# Altium PCB ESC_v7.PcbDoc
Units mm, origin at the board's own origin, x right, y up, seen from the top; angles counter-clockwise.
Board outline 42.8 x 30.48 mm, 2 copper layers (Top Layer, Bottom Layer); 64 components, 49 nets, 190 pads, 0 vias.
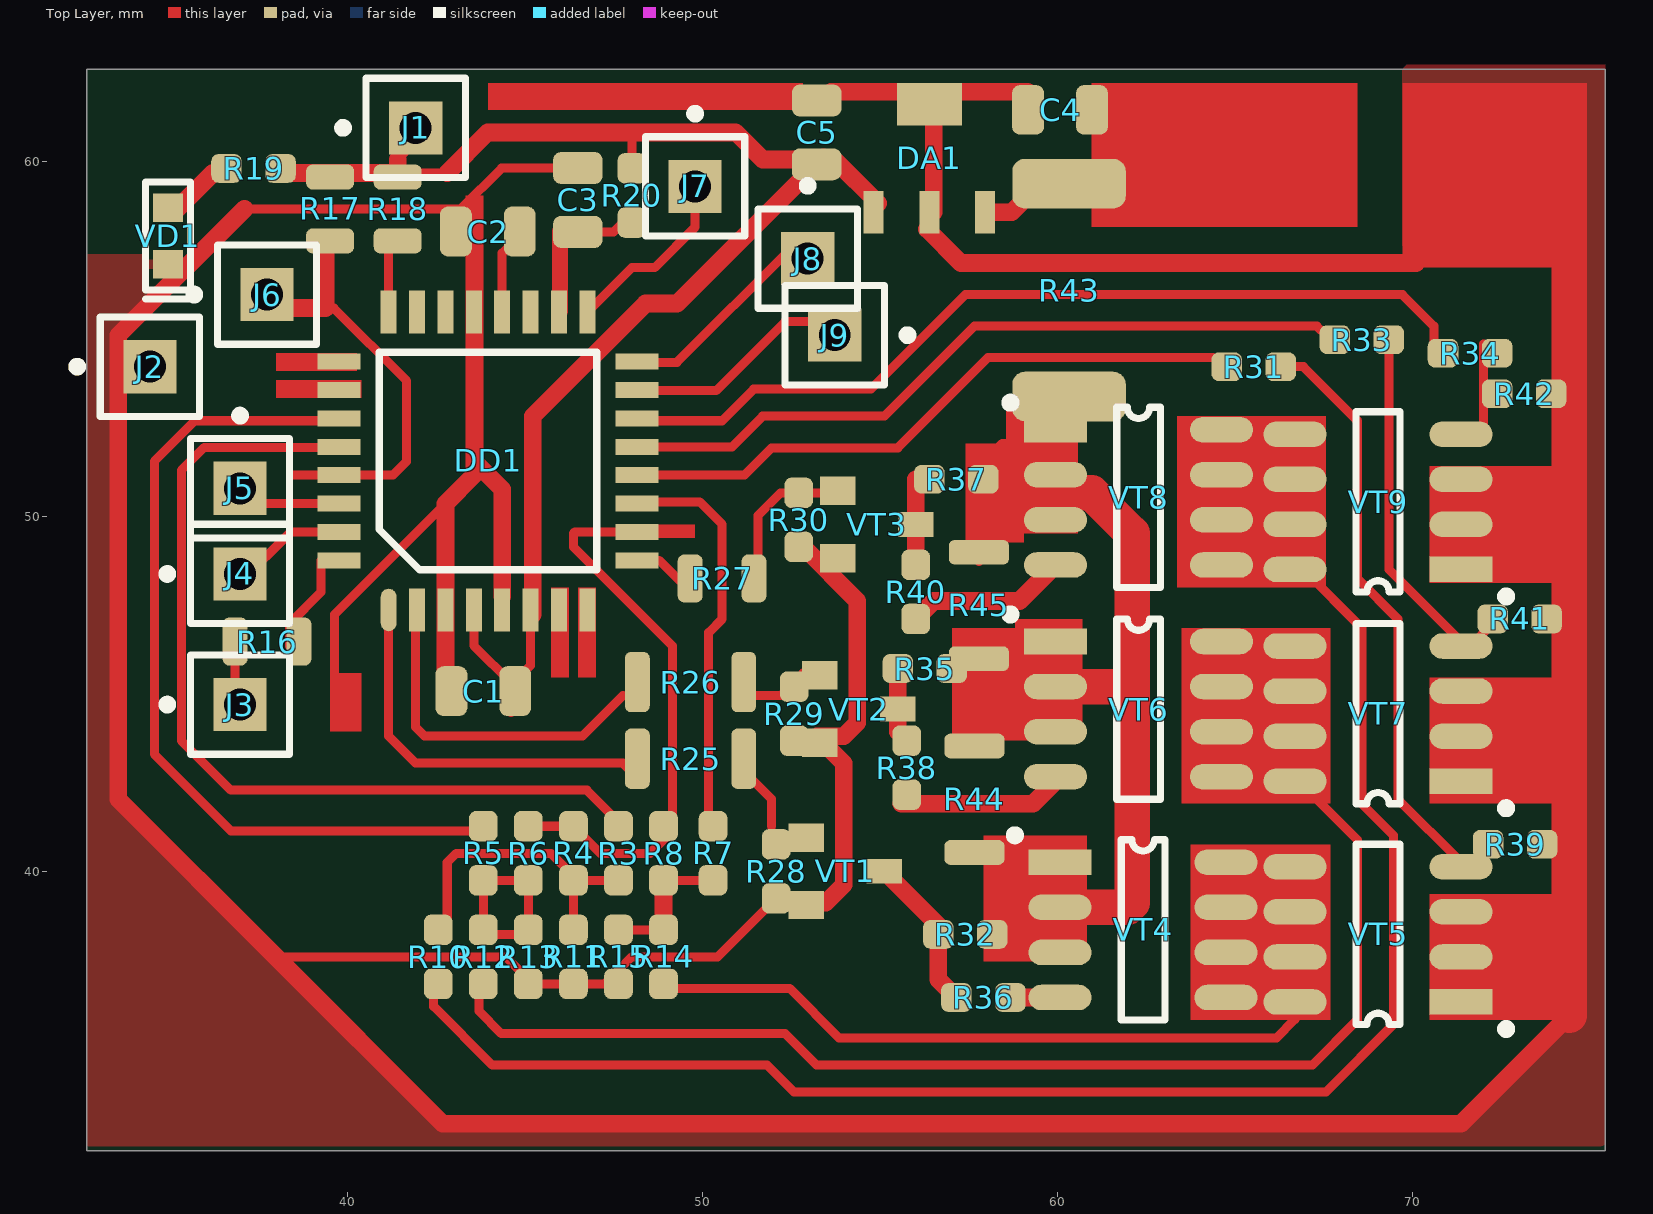
[diagram p0: Top Layer view]
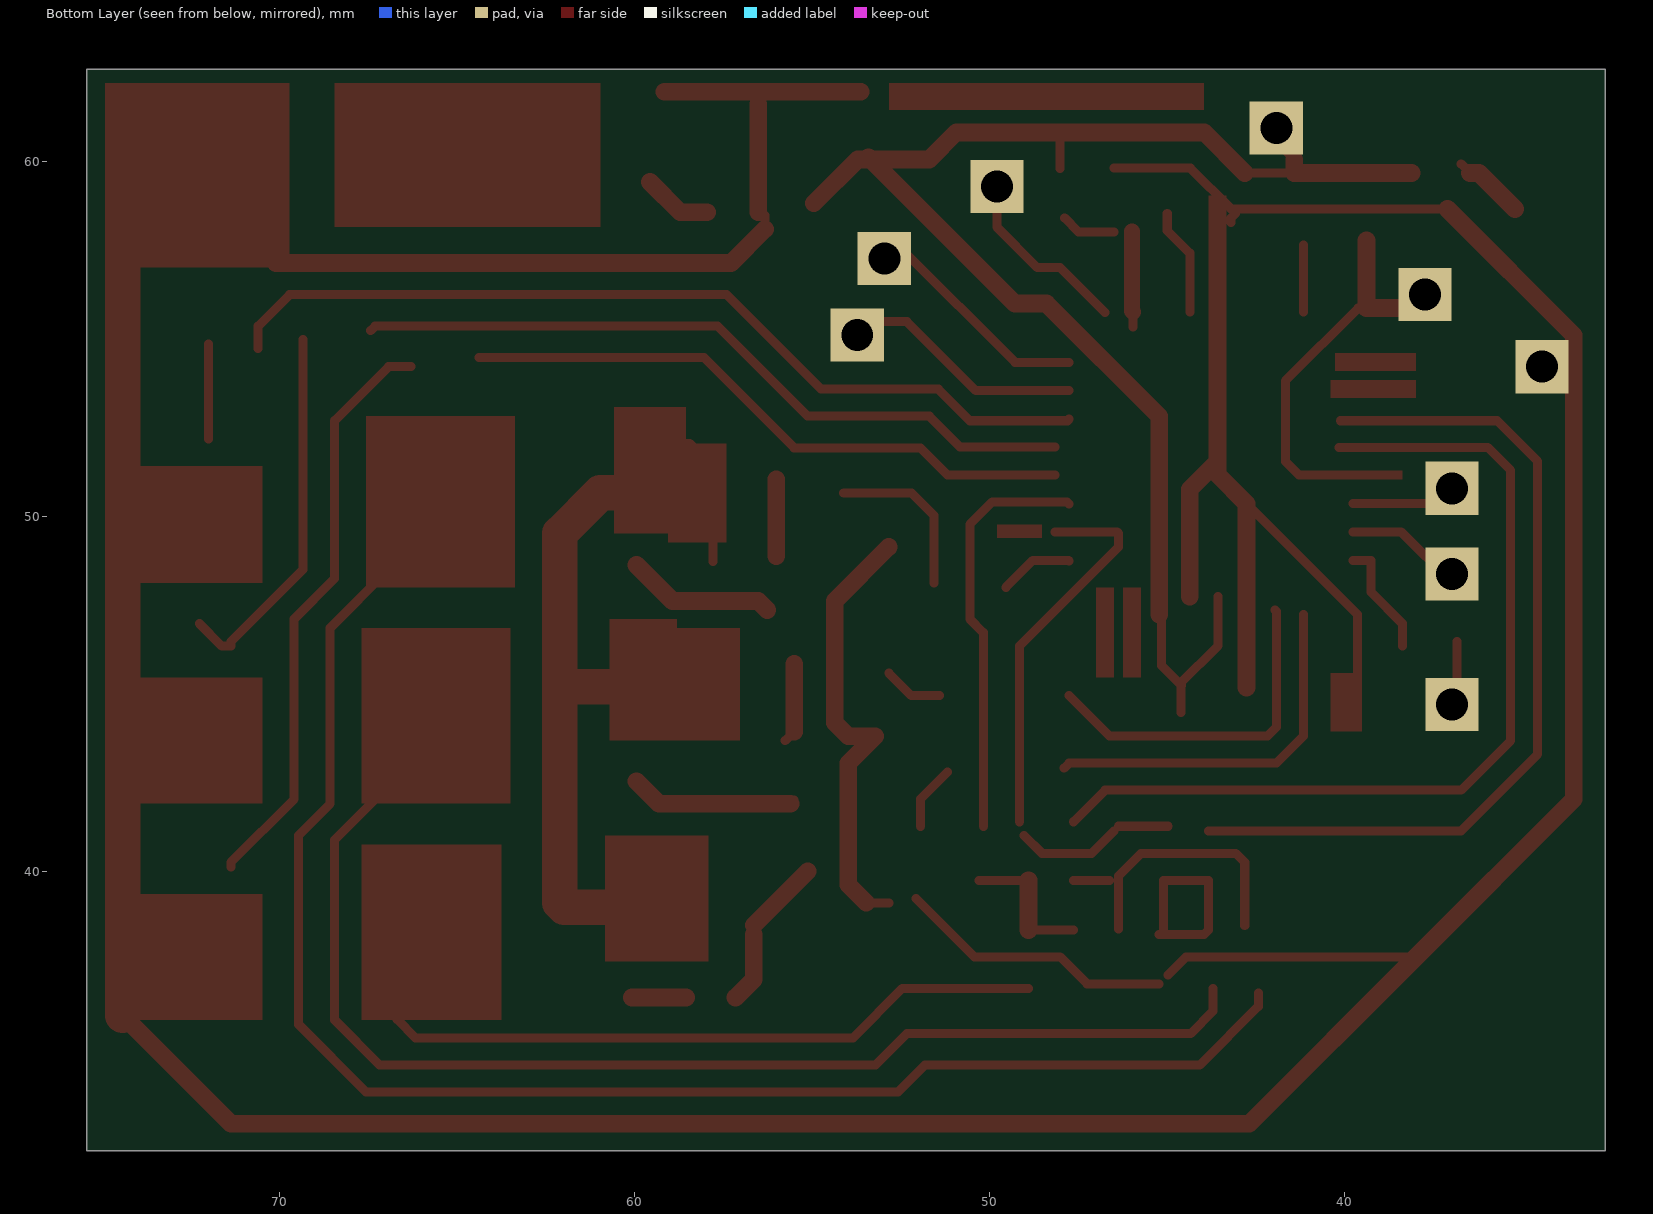
[diagram p1: Bottom Layer view, seen from below]
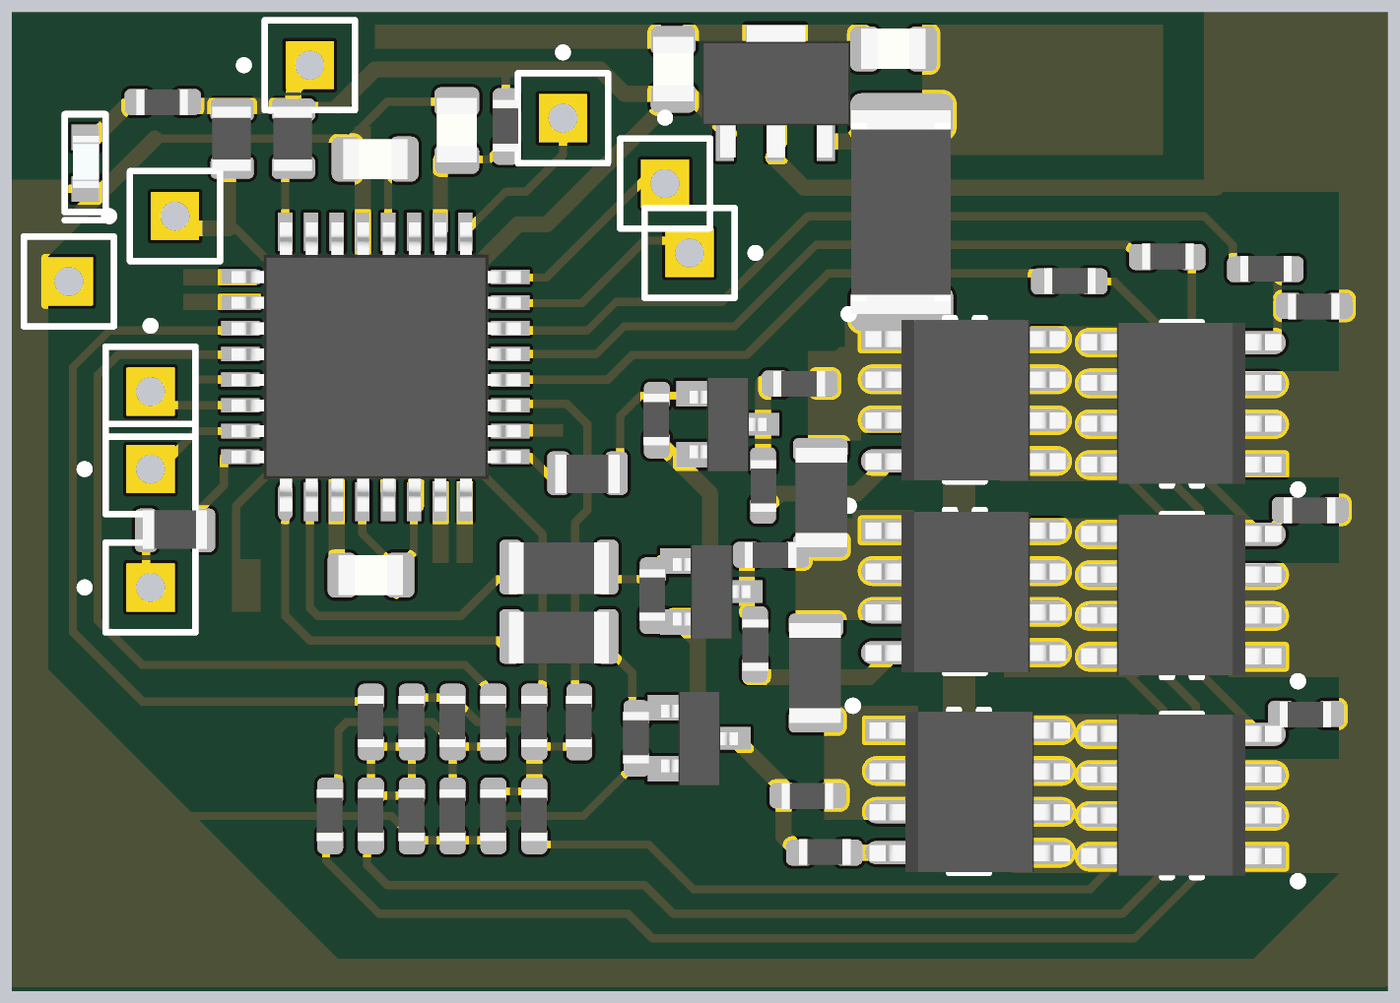
[diagram p2: 3D render of the assembled board from above, using the file's embedded part models]

## Layer stack, top to bottom
Top Solder: solder mask 0.0102, Solder Resist, Dk 3.5
Top Layer: signal copper 0.0356
Dielectric1: dielectric 0.32, FR-4, Dk 4.8
Bottom Layer: signal copper 0.0356
Bottom Solder: solder mask 0.0102, Solder Resist, Dk 3.5

## Board outline
32.639,32.131 75.438,32.131 75.438,62.611 32.639,62.611

## Design rules (kind name [scope] priority, off if disabled: settings)
Clearance [All] p1: gap=0.1
ComponentClearance [All] p1: gap=0 collisioncheckmode=3 verticalgap=0 showdistances=FALSE
FabricationTestPointUsage TestPointUsage [All] p1: valid=0 allowmultiple=FALSE
FabricationTestpoint Testpoint [All] p1: side=3 testpointundercomponent=TRUE minsize=1.016 maxsize=2.54 preferedsize=1.524 minholesize=0 maxholesize=1.016 preferedholesize=0.813 testpointgrid=0.025 allowsidetop=TRUE allowsidebottom=TRUE usegrid=TRUE gridtolerance=0
MinimumSolderMaskSliver [All] p1 off: minsoldermaskwidth=0.254
PolygonConnect [All] p1: connectstyle=Relief reliefconductorwidth=0.254 reliefentries=4 polygonreliefangle="90 Angle" airgapwidth=0.254
RoutingVias [All] p1: holewidth=0.711 width=1.27 viastyle="Through Hole" minholewidth=0.711 minwidth=1.27 maxholewidth=0.711 maxwidth=1.27
SilkToSolderMaskClearance SilkscreenOverComponentPads [IsPad] p1 off: minsilkscreentomaskgap=0.254 clearancetoexposedcopper=TRUE
SolderMaskExpansion [All] p1: expansion=0.102
Width [All] p1: maxlimit=1 minlimit=0.254 preferedwidth=0.5
25 further rules are at their usual default settings.

## Components (designator, comment, footprint, x,y, rotation, side; value= is the part's Value field where it differs from the comment)
C1 "0.1uF" CAP0805 43.815,45.085 r180 top
C2 "0.1uF" CAP0805 43.942,58.039 r0 top
C3 "0.1uF" CAP0805 46.482,58.928 r90 top
C4 "0.1uF" CAP0805 60.071,61.468 r180 top
C5 "0.1uF" CAP0805 53.213,60.833 r90 top
DA1 "L78L05" SOT89 56.388,59.182 r0 top
DD1 "ATmega8a" ATMEGA8A 41.148,47.371 r90 top
J1 "VCC 5V" PIN1 41.91,60.96 r90 top
J2 "VSS" PIN1 34.417,54.229 r90 top
J3 "Socket" PIN1 36.957,44.704 r90 top
J4 "Socket" PIN1 36.957,48.387 r90 top
J5 "Socket" PIN1 36.957,50.8 r0 top
J6 "Socket" PIN1 37.719,56.261 r90 top
J7 "Socket" PIN1 49.784,59.309 r0 top
J8 "Socket" PIN1 52.959,57.277 r0 top
J9 "Socket" PIN1 53.721,55.118 r270 top
R3 "33k" RES0603 47.625,40.513 r90 top
R4 "33k" RES0603 46.355,40.513 r90 top
R5 "33k" RES0603 43.815,40.513 r90 top
R6 "33k" RES0603 45.085,40.513 r90 top
R7 "33k" RES0603 50.292,40.513 r90 top
R8 "33k" RES0603 48.895,40.513 r90 top
R10 "33k" RES0603 42.545,37.592 r90 top
R11 "12k" RES0603 46.355,37.592 r90 top
R12 "33k" RES0603 43.815,37.592 r90 top
R13 "12k" RES0603 45.085,37.592 r90 top
R14 "33k" RES0603 48.895,37.592 r90 top
R15 "12k" RES0603 47.625,37.592 r90 top
R16 "100" RES0805 37.719,46.482 r0 top
R17 "10k" RES0805 39.497,58.674 r90 top
R18 "10k" RES0805 41.402,58.674 r90 top
R19 "1k" RES0603 37.338,59.817 r180 top
R20 "100" RES0603 48.006,59.055 r90 top
R25 "0" RES1206 49.657,43.18 r180 top
R26 "0" RES1206 49.657,45.339 r180 top
R27 "0" RES0805 50.546,48.26 r180 top
R28 "10K" RES0603 52.07,40.005 r90 top
R29 "10K" RES0603 52.578,44.45 r90 top
R30 "10K" RES0603 52.705,49.911 r90 top
R31 "100" RES0603 65.532,54.229 r0 top
R32 "2k" RES0603 57.404,38.227 r180 top
R33 "100" RES0603 68.58,54.991 r0 top
R34 "100" RES0603 71.628,54.61 r0 top
R35 "2k" RES0603 56.261,45.72 r180 top
R36 "100" RES0603 57.912,36.449 r0 top
R37 "2k" RES0603 57.15,51.054 r180 top
R38 "100" RES0603 55.753,42.926 r270 top
R39 "10K" RES0603 72.898,40.767 r180 top
R40 "100" RES0603 56.007,47.879 r270 top
R41 "10K" RES0603 73.025,47.117 r180 top
R42 "10K" RES0603 73.152,53.467 r180 top
R43 "0" RES2512 60.325,56.388 r90 top
R44 "0" RES1206 57.658,42.037 r90 top
R45 "0" RES1206 57.785,47.498 r270 top
VD1 "KP-1608SURC" "DIODE 1608" 34.925,57.912 r90 top
VT1 "2N7002" SOT23 55.118,40.005 r270 top
VT2 "2N7002" SOT23 55.499,44.577 r270 top
VT3 "2N7002" SOT23 56.007,49.784 r270 top
VT4 "IRF9310PbF" "SO-8 IRF..." 60.071,40.259 r0 top
VT5 "IRF8736PbF" "SO-8 IRF..." 71.374,36.322 r180 top
VT6 "IRF9310PbF" "SO-8 IRF..." 59.944,46.482 r0 top
VT7 "IRF8736PbF" "SO-8 IRF..." 71.374,42.545 r180 top
VT8 "IRF9310PbF" "SO-8 IRF..." 59.944,52.451 r0 top
VT9 "IRF8736PbF" "SO-8 IRF..." 71.374,48.514 r180 top

## Footprints (in the part's own frame and the unit in brackets; to place one, negate y for a bottom-side part, rotate by r counter-clockwise, add the part's x,y. Pads: shape width x height; smd on the part's side, far side on the other; paste and mask are expansions set on the pad)
ATMEGA8A [mm]
  oval 1.2x0.45 smd: 1(0,0)
  rect 1.2x0.45 smd: 2(0,-0.8) 3(0,-1.6) 4(0,-2.4) 5(0,-3.2) 6(0,-4) 7(0,-4.8) 8(0,-5.6) 17(8.4,-5.6) 18(8.4,-4.8) 19(8.4,-4) 20(8.4,-3.2) 21(8.4,-2.4) 22(8.4,-1.6) 23(8.4,-0.8) 24(8.4,0)
  rect 0.45x1.2 smd: 9(1.4,-7) 10(2.2,-7) 11(3,-7) 12(3.8,-7) 13(4.6,-7) 14(5.4,-7) 15(6.2,-7) 16(7,-7) 25(7,1.4) 26(6.2,1.4) 27(5.4,1.4) 28(4.6,1.4) 29(3.8,1.4) 30(3,1.4) 31(2.2,1.4) 32(1.4,1.4)
  silkscreen extent 1.13,-5.87 7.27,0.27, body extent -0.3,-7.32 8.7,1.68, height 1.6
CAP0805 [mm]
  rrect50% 0.9x1.4 smd: 1(-0.9,0) 2(0.9,0)
  body extent -0.99,-0.63 1.01,0.62, height 1.3
"DIODE 1608" [mm]
  rect 0.8x0.85 smd: 1(-0.8,0) 2(0.8,0)
  silkscreen extent -1.78,-0.64 1.52,0.64, body extent -0.77,-0.42 0.85,0.38, height 1.1
PIN1 [mm] "Connector; Plug"
  rect 1.5x1.5 hole 0.9: 1(0,0)
  silkscreen extent -1.4,-1.4 1.4,2.17
RES0603 [mm]
  rrect50% 0.86x0.81 smd: 1(-0.762,0) 2(0.762,0)
  body extent -0.78,-0.38 0.82,0.42, height 0.45
RES0805 [mm]
  rrect50% 0.7x1.35 smd: 1(-0.9,0) 2(0.9,0)
  body extent -1,-0.58 1,0.62, height 0.5
RES1206 [mm]
  rrect50% 0.7x1.7 smd: 1(-1.5,0) 2(1.5,0)
  body extent -1.55,-0.76 1.55,0.84, height 0.55
RES2512 [mm]
  rrect50% 1.4x3.2 smd: 1(-3,0) 2(3,0)
  body extent -3.17,-1.52 3.18,1.58, height 0.55
"SO-8 IRF..." [mm]
  rect 1.78x0.72 smd: 1(0,0)
  oval 1.78x0.72 smd: 2(0,-1.27) 3(0,-2.54) 4(0,-3.81) 5(4.68,-3.81) 6(4.68,-2.54) 7(4.68,-1.27) 8(4.68,0)
  silkscreen extent -1.4,-4.44 2.96,0.89, body extent -0.75,-4.42 5.48,0.58, height 1.75
SOT23 [mm]
  rect 0.8x1 smd: 1(-0.95,-2.2) 2(0.95,-2.2)
  rect 0.7x1 smd: 3(0,0)
  body extent -1.44,-2.29 1.46,0.11, height 1.02
SOT89 [mm]
  rect 0.56x1.2 smd: 1(-1.57,-0.6) 2(0,-0.6) 3(1.57,-0.6)
  rect 1.83x1.2 smd: 2(0,2.45)
  body extent -2.27,-1.09 2.33,3.01, height 1.6

## Part data
C1 C2 C3 C4 C5: library part Capacitor
DA1: library part DA-L78L05, "LDO"
DD1: "MCU 8MHz"
J1 J2: library part Socket, "Socket"
R3 R4 R5 R6 R7 R8 R10 R11 R12 R13 R14 R15 R16 R17 R18 R19 R20 R25 R26 R27 R28 R29 R30 R31 R32 R33 R34 R35 R36 R37 R38 R39 R40 R41 R42 R43 R44 R45: library part Resistor
VD1: library part LED_0603
VT4 VT6 VT8: "P-MOSFET -20A"
VT5 VT7 VT9: "N-MOSFET 18A"

## Nets (pads, with @x,y where several pads share a name; then routed paths per layer and width w, separated by ;. In a path a pad name is that pad's centre, name@x,y a point inside that pad or via, vN(x,y) a via of type N, cw(c..) or ccw(c..) an arc to the next point about the centre after c; other vN are vias at no path point)
5V: C1.1 C5.1 DA1.1 DD1.4 DD1.6 J1.1 R17.2 R18.2 R19.1 R20.2 | length 43.8
  Top Layer w0.254: R18.2 41.402,59.69 42.799,59.69 ; 41.402,60.071 J1.1@42.037,60.706 ; DD1.4@43.548,47.752 43.548,46.368 C1.1@44.628,45.288 ; C1.1@44.577,45.237 45.148,45.808 DD1.6 DD1.6@45.148,47.752 ; C1.1@44.602,44.475 C1.1@44.602,45.212 ; R20.2 48.006,60.833
  Top Layer w0.5: R19.1@38.1,59.69 41.402,59.69 41.402,60.071 ; 42.799,59.69 43.942,60.833 48.006,60.833 50.927,60.833 51.689,60.071 53.71,60.071 DA1.1@54.945,58.836 ; DD1.6@45.212,47.244 45.212,52.832 48.387,56.007 49.276,56.007 C5.1@53.404,60.134
ADC_0: DD1.10 R4.2 R6.2 R8.2 | length 15.5
  Top Layer w0.254: R6.2@44.958,41.275 R6.2 R4.2 ; R4.2@46.482,41.148 47.117,40.513 48.514,40.513 R8.2@49.022,41.021 ; DD1.10 46.396,49.571 46.355,49.53 46.355,49.149 49.149,46.355 R8.2@49.149,41.402
ADC_1: DD1.11 R7.2 | length 11.8
  Top Layer w0.254: DD1.11@47.748,50.352 47.815,50.419 49.911,50.419 50.546,49.784 50.546,47.117 50.165,46.736 R7.2@50.165,41.275
ADC_2: DD1.27 R5.2 | length 24.5
  Top Layer w0.254: DD1.27@40.101,52.705 35.687,52.705 34.544,51.562 34.544,43.307 36.703,41.148 R5.2@43.815,41.148
ADC_3: DD1.28 R3.2 | length 26
  Top Layer w0.254: DD1.28@40.148,51.952 35.95,51.952 35.306,51.308 35.306,43.688 36.703,42.291 46.736,42.291 R3.2@47.625,41.402
GND: C1.2 C2.1 C3.2 C4.2 C5.2 DA1.2 DD1.3 DD1.5 DD1.21 J2.1 R11.1 R13.1 R15.1 R28.1 R29.1 R30.1 R39.1 R41.1 R42.1 VD1.1 VT1.2 VT2.2 VT3.2 VT5.1 VT5.2 VT5.3 VT7.1 VT7.2 VT7.3 VT9.1 VT9.2 VT9.3 | length 179.8
  Top Layer w0.254: 37.084,58.674 C2.1@43.18,58.674 ; 37.973,37.592 44.45,37.592 R13.1@44.958,37.084 ; 39.624,44.45 39.624,47.244 42.748,50.368 42.748,50.407 ; C2.1@43.18,58.293 43.18,58.42 43.053,58.547 C2.1@43.18,58.674 ; 43.548,51.168 DD1.21 43.548,58.039 ; R13.1@45.212,36.83 R11.1 47.244,36.83 48.006,37.592 50.419,37.592 R28.1 ; C3.2 44.334,59.828 C2.1@43.18,58.674 ; VT1.2@52.832,39.116 53.467,39.116 ; DA1.2@56.325,58.102 DA1.2@56.325,58.483 ; 70.104,57.15 71.374,58.42 74.422,58.42 ; VT7.1 VT7.2 VT7.3
  Top Layer w0.5: 37.084,58.674 33.528,55.118 33.528,42.037 37.973,37.592 42.672,32.893 71.374,32.893 74.422,35.941 ; C1.2@42.748,45.186 42.748,50.368 43.548,51.168 ; 43.561,51.562 44.348,50.775 DD1.5@44.348,47.752 ; R30.1@52.832,49.149 54.356,47.625 54.356,44.196 53.975,43.815 53.213,43.815 53.975,43.053 53.975,39.624 53.467,39.116 ; C5.2@53.619,61.976 C4.2@59.157,61.976 ; DA1.2@56.325,58.102 57.277,57.15 70.104,57.15 ; DA1.2@56.515,58.582 DA1.2@56.515,61.632
  Top Layer w1: 74.422,35.941 74.422,58.42
NetC2_2: C2.2 DD1.20 | length 3
  Top Layer w0.254: DD1.20 44.348,57.429 44.983,58.064 C2.2@44.983,58.547
NetC3_1: C3.1 DD1.18 R20.1 | length 4.3
  Top Layer w0.254: DD1.18@45.948,55.352 DD1.18 ; C3.1 47.487,58.028 R20.1@47.879,58.42
  Top Layer w0.45: DD1.18 45.974,55.797 C3.1@45.974,58.039
NetDD1_24: DD1.24 R18.1 | length 1.9
  Top Layer w0.254: DD1.24 R18.1@41.148,57.658
NetJ3_1: J3.1 R16.1 | length 1.8
  Top Layer w0.254: R16.1 36.819,44.715 J3.1@36.83,44.704
NetR3_1: R3.1 R4.1 R10.2 R11.2 | length 8.2
  Top Layer w0.254: R10.2@42.799,38.481 42.799,40.259 43.053,40.513 45.72,40.513 46.355,39.878 R4.1 R11.2@46.355,38.379 ; R4.1@46.609,39.751 R3.1
NetR5_1: R5.1 R6.1 R12.2 R13.2 | length 5.5
  Top Layer w0.254: R13.2 R6.1 R5.1 R12.2 43.942,38.227 R13.2@45.212,38.227
NetR7_1: R7.1 R8.1 R14.2 R15.2 | length 4.1
  Top Layer w0.254: R15.2 R14.2 ; R8.1 R7.1
  Top Layer w0.5: R14.2 R8.1
NetR19_2: R19.2 VD1.2 | length 2.1
  Top Layer w0.254: R19.2@36.449,59.69 R19.2@36.703,59.944
  Top Layer w0.5: VD1.2@35.179,58.674 36.195,59.69 R19.2@36.449,59.69
NetR25_1: R25.1 R28.2 VT1.1 | length 1.8
  Top Layer w0.254: R25.1@51.181,42.799 51.943,42.037 51.943,41.275
NetR26_1: R26.1 R29.2 VT2.1 | length 1.7
  Top Layer w0.254: R26.1@51.41,44.958 52.197,44.958 R29.2@52.832,45.593
NetR27_1: R27.1 R30.2 VT3.1 | length 4.7
  Top Layer w0.254: R27.1@51.562,48.133 51.562,50.038 52.197,50.673 VT3.1@54.102,50.673
NetR31_2: R31.2 R39.2 VT5.4 | length 16.6
  Top Layer w0.254: R31.2 66.929,54.229 68.453,52.705 68.453,48.26 69.596,47.117 69.596,42.037 71.374,40.259 VT5.4
NetR32_2: R32.2 R36.1 VT1.3 | length 4.4
  Top Layer w0.254: R32.2 R32.2@56.642,38.481
  Top Layer w0.5: VT1.3 R32.2@56.642,38.481 ; R32.2 56.642,36.957 R36.1
NetR33_2: R33.2 R41.2 VT7.4 | length 10.6
  Top Layer w0.254: R33.2 69.342,48.514 71.374,46.482 VT7.4 71.628,46.355 R41.2@72.263,46.99
NetR34_2: R34.2 R42.2 VT9.4 | length 2.7
  Top Layer w0.254: VT9.4@72.009,52.197 R34.2@72.009,54.864
NetR35_2: R35.2 R38.1 VT2.3 | length 2.3
  Top Layer w0.254: R38.1@55.499,43.942 R38.1
  Top Layer w0.5: R38.1@55.499,43.942 VT2.3 R35.2@55.499,45.847
NetR36_2: R36.2 VT4.4 | length 1.5
  Top Layer w0.5: R36.2@58.547,36.449 VT4.4
NetR37_2: R37.2 R40.1 VT3.3 | length 2.2
  Top Layer w0.5: R40.1@56.007,48.895 R37.2@56.007,51.054
NetR38_2: R38.2 VT6.4 | length 4.8
  Top Layer w0.254: R38.2@55.499,42.012 R38.2@55.601,41.91
  Top Layer w0.5: R38.2@55.601,41.91 59.309,41.91 VT6.4@59.944,42.545
NetR40_2: R40.2 VT8.4 | length 4.2
  Top Layer w0.5: R40.2@56.261,47.371 56.515,47.625 58.928,47.625 VT8.4
OUT_A0: DD1.12 R31.1 | length 17.6
  Top Layer w0.254: DD1.12 51.171,51.171 51.943,51.943 55.499,51.943 58.039,54.483 R31.1@64.389,54.483
OUT_A1: DD1.1 R25.2 | length 10.5
  Top Layer w0.254: DD1.1@41.148,47.244 41.148,43.815 41.91,43.053 47.752,43.053 R25.2@47.892,42.913
OUT_B0: DD1.13 R33.1 | length 20.9
  Top Layer w0.254: DD1.13 49.911,51.971 ; 50.066,51.971 49.911,51.971 ; R33.1@67.437,55.245 67.31,55.372 57.658,55.372 55.118,52.832 51.689,52.832 50.828,51.971 49.911,51.971
OUT_B1: DD1.2 R26.2 | length 9.7
  Top Layer w0.254: DD1.2 41.91,47.333 41.91,44.069 42.164,43.815 46.609,43.815 47.752,44.958
OUT_C0: DD1.14 R34.1 | length 25.4
  Top Layer w0.254: DD1.14@47.748,52.752 47.795,52.705 50.546,52.705 51.435,53.594 54.737,53.594 57.404,56.261 69.723,56.261 70.612,55.372 R34.1@70.612,54.737
OUT_C1: DD1.9 R27.2 | length 2.1
  Top Layer w0.254: DD1.9@47.748,48.752 47.764,48.768 48.768,48.768 R27.2@49.53,48.006
PIN_OUT: DD1.32 R16.2 | length 3.3
  Top Layer w0.254: R16.2@38.354,46.355 38.354,46.99 39.243,47.879 39.243,48.768 39.246,48.771 DD1.32
POINT_A: R14.1 VT4.5 VT4.6 VT4.7 VT4.8 VT5.5 VT5.6 VT5.7 VT5.8 | length 25.1
  Top Layer w0.254: R14.1@48.895,36.703 52.451,36.703 53.848,35.306 66.167,35.306 66.694,35.833 VT5.5 ; VT4.5@64.516,36.703 VT4.7@64.516,38.862
POINT_B: R12.1 VT6.5 VT6.6 VT6.7 VT6.8 VT7.5 VT7.6 VT7.7 VT7.8 | length 42.5
  Top Layer w0.254: R12.1@43.688,36.703 43.688,36.068 44.323,35.433 52.324,35.433 53.213,34.544 67.183,34.544 68.453,35.814 68.453,40.894 66.694,42.653 VT7.7 VT7.6 VT7.5 ; VT6.7@64.516,45.085 64.516,42.545 VT7.8
POINT_C: R10.1 VT8.5 VT8.6 VT8.7 VT8.8 VT9.5 VT9.6 VT9.7 VT9.8 | length 48.9
  Top Layer w0.254: R10.1@42.418,36.576 42.418,36.195 44.069,34.544 51.816,34.544 52.578,33.782 67.564,33.782 69.469,35.687 69.469,41.021 68.58,41.91 68.58,46.863 VT9.8@66.929,48.514 ; VT8.6@64.389,49.784 VT8.7@64.389,51.054 ; VT9.8@66.694,48.24 VT9.8@66.694,48.26 ; VT9.5 VT9.6 VT9.7 VT9.8 VT9.8@66.929,48.514 ; 66.929,49.022 VT9.8@66.929,48.514
PORT_B6: DD1.7
PORT_B7: DD1.8
PORT_C2: DD1.25
PORT_C3: DD1.26
PRG_MISO: DD1.16 J8.1 | length 6
  Top Layer w0.254: DD1.16@47.748,54.352 49.272,54.352 J8.1@52.451,57.531
PRG_MOSI: DD1.15 J9.1 | length 7
  Top Layer w0.254: DD1.15@47.748,53.552 50.377,53.552 52.324,55.499 J9.1@53.975,55.499
PRG_RST: DD1.29 J6.1 R17.1 | length 11.4
  Top Layer w0.254: 39.37,55.88 39.603,55.88 41.656,53.827 41.656,51.562 41.265,51.171 DD1.29
  Top Layer w0.5: J6.1@37.338,55.88 39.37,55.88 R17.1@39.37,57.785
PRG_SCK: DD1.17 J7.1 | length 5.3
  Top Layer w0.254: DD1.17@46.736,55.753 48.006,57.023 48.641,57.023 49.784,58.166 J7.1@49.784,59.436
RXD: DD1.30 J5.1 | length 3
  Top Layer w0.254: J5.1 37.386,50.371 DD1.30
TXD: DD1.31 J4.1 | length 3.4
  Top Layer w0.254: J4.1@36.957,48.133 38.395,49.571 DD1.31
V_DIV: DD1.23
VCC1: R32.1 R35.1 R37.1 R43.1 R44.1 R44.2 R45.1 R45.2 VT4.1 VT4.2 VT4.3 VT6.1 VT6.2 VT6.3 VT8.1 VT8.2 VT8.3 | length 31.1
  Top Layer w0.254: 57.302,44.958 59.69,44.958 59.826,45.094 VT6.2 ; R45.1@57.785,48.743 57.785,51.41 58.445,52.07 59.182,52.07 ; R32.1@58.318,38.227 59.69,38.227 ; VT4.3@59.557,37.998 VT4.3@59.836,37.719 ; 59.709,40.894 59.836,40.767 VT4.3@59.836,37.719 ; VT4.3@59.836,37.592 VT4.3@59.836,37.719 ; VT4.3 VT4.3@59.836,37.719
  Top Layer w1: 59.309,50.673 60.96,50.673 62.103,49.53 62.103,45.212 ; VT6.2@59.455,45.466 59.826,45.094 VT6.2@59.836,45.085 ; VT4.2@59.944,38.735 60.198,38.989 61.976,38.989 62.103,39.116 62.103,45.212 ; VT6.2 62.103,45.212
VCC_POWER: C4.1 DA1.3 R43.2 | length 4.5
  Top Layer w0.254: 63.125,58.933 65.659,58.933
  Top Layer w0.5: DA1.3 58.709,58.582 R43.2@59.563,59.436
pads on no net: DD1.19 DD1.22

## Polygon pours and split planes (outlines as drawn)
GND on Top Layer "GND_L06" (solid, pour order 0): 71.755,60.833 74.422,58.166 74.422,57.023 74.422,36.068 74.295,35.941 71.374,33.02 71.374,32.893 42.799,32.893 33.655,42.037 33.528,42.037 33.528,54.991 35.941,57.404 32.639,57.404 32.639,32.258 75.311,32.258 75.438,32.131 75.438,62.738 69.85,62.738 69.723,62.611 69.723,57.404

## Other copper
Top Layer:
  rectangle net GND: 70.485,48.133 74.295,51.435
  rectangle net PRG_RST: 38.354,51.054 40.386,51.308
  rectangle net PORT_C2: 37.973,54.102 40.259,54.61
  rectangle net PORT_C3: 37.973,53.34 40.386,53.848
  rectangle net PORT_B6: 45.72,45.466 46.228,48.006
  rectangle net PORT_B7: 46.482,45.466 46.99,48.006
  rectangle net POINT_A: 65.786,39.37 67.691,40.64
  rectangle net POINT_B: 63.5,41.91 67.691,46.863
  rectangle net POINT_C: 63.373,48.006 67.564,52.832
  rectangle net GND: 70.485,41.91 74.168,45.466
  rectangle net GND: 70.485,35.814 74.422,39.37
  rectangle net VCC1: 58.801,43.688 60.706,47.117
  rectangle net VCC1: 58.547,49.53 60.579,53.086
  rectangle net VCC_POWER: 60.96,58.166 68.453,62.23
  rectangle net GND: 69.723,57.023 74.93,62.23
  rectangle net POINT_A: 63.754,35.814 67.691,40.767
  rectangle net VCC1: 57.023,43.688 59.69,46.863
  rectangle net VCC1: 57.404,49.276 59.055,52.07
  rectangle net VCC1: 57.912,37.465 60.833,41.021
  rectangle net ADC_0: 48.514,49.403 49.784,49.784
  rectangle net GND: 39.497,43.942 40.386,45.593
  rectangle net GND: 43.307,51.054 43.815,59.055
  rectangle net GND: 43.942,61.468 52.832,62.23

## Silkscreen, mask and mechanical layers (free items; w line width, h text height)
Mechanical 2:
  the board outline again, w0.254